# EAGLE board all_board (EAGLE 7.6.0)
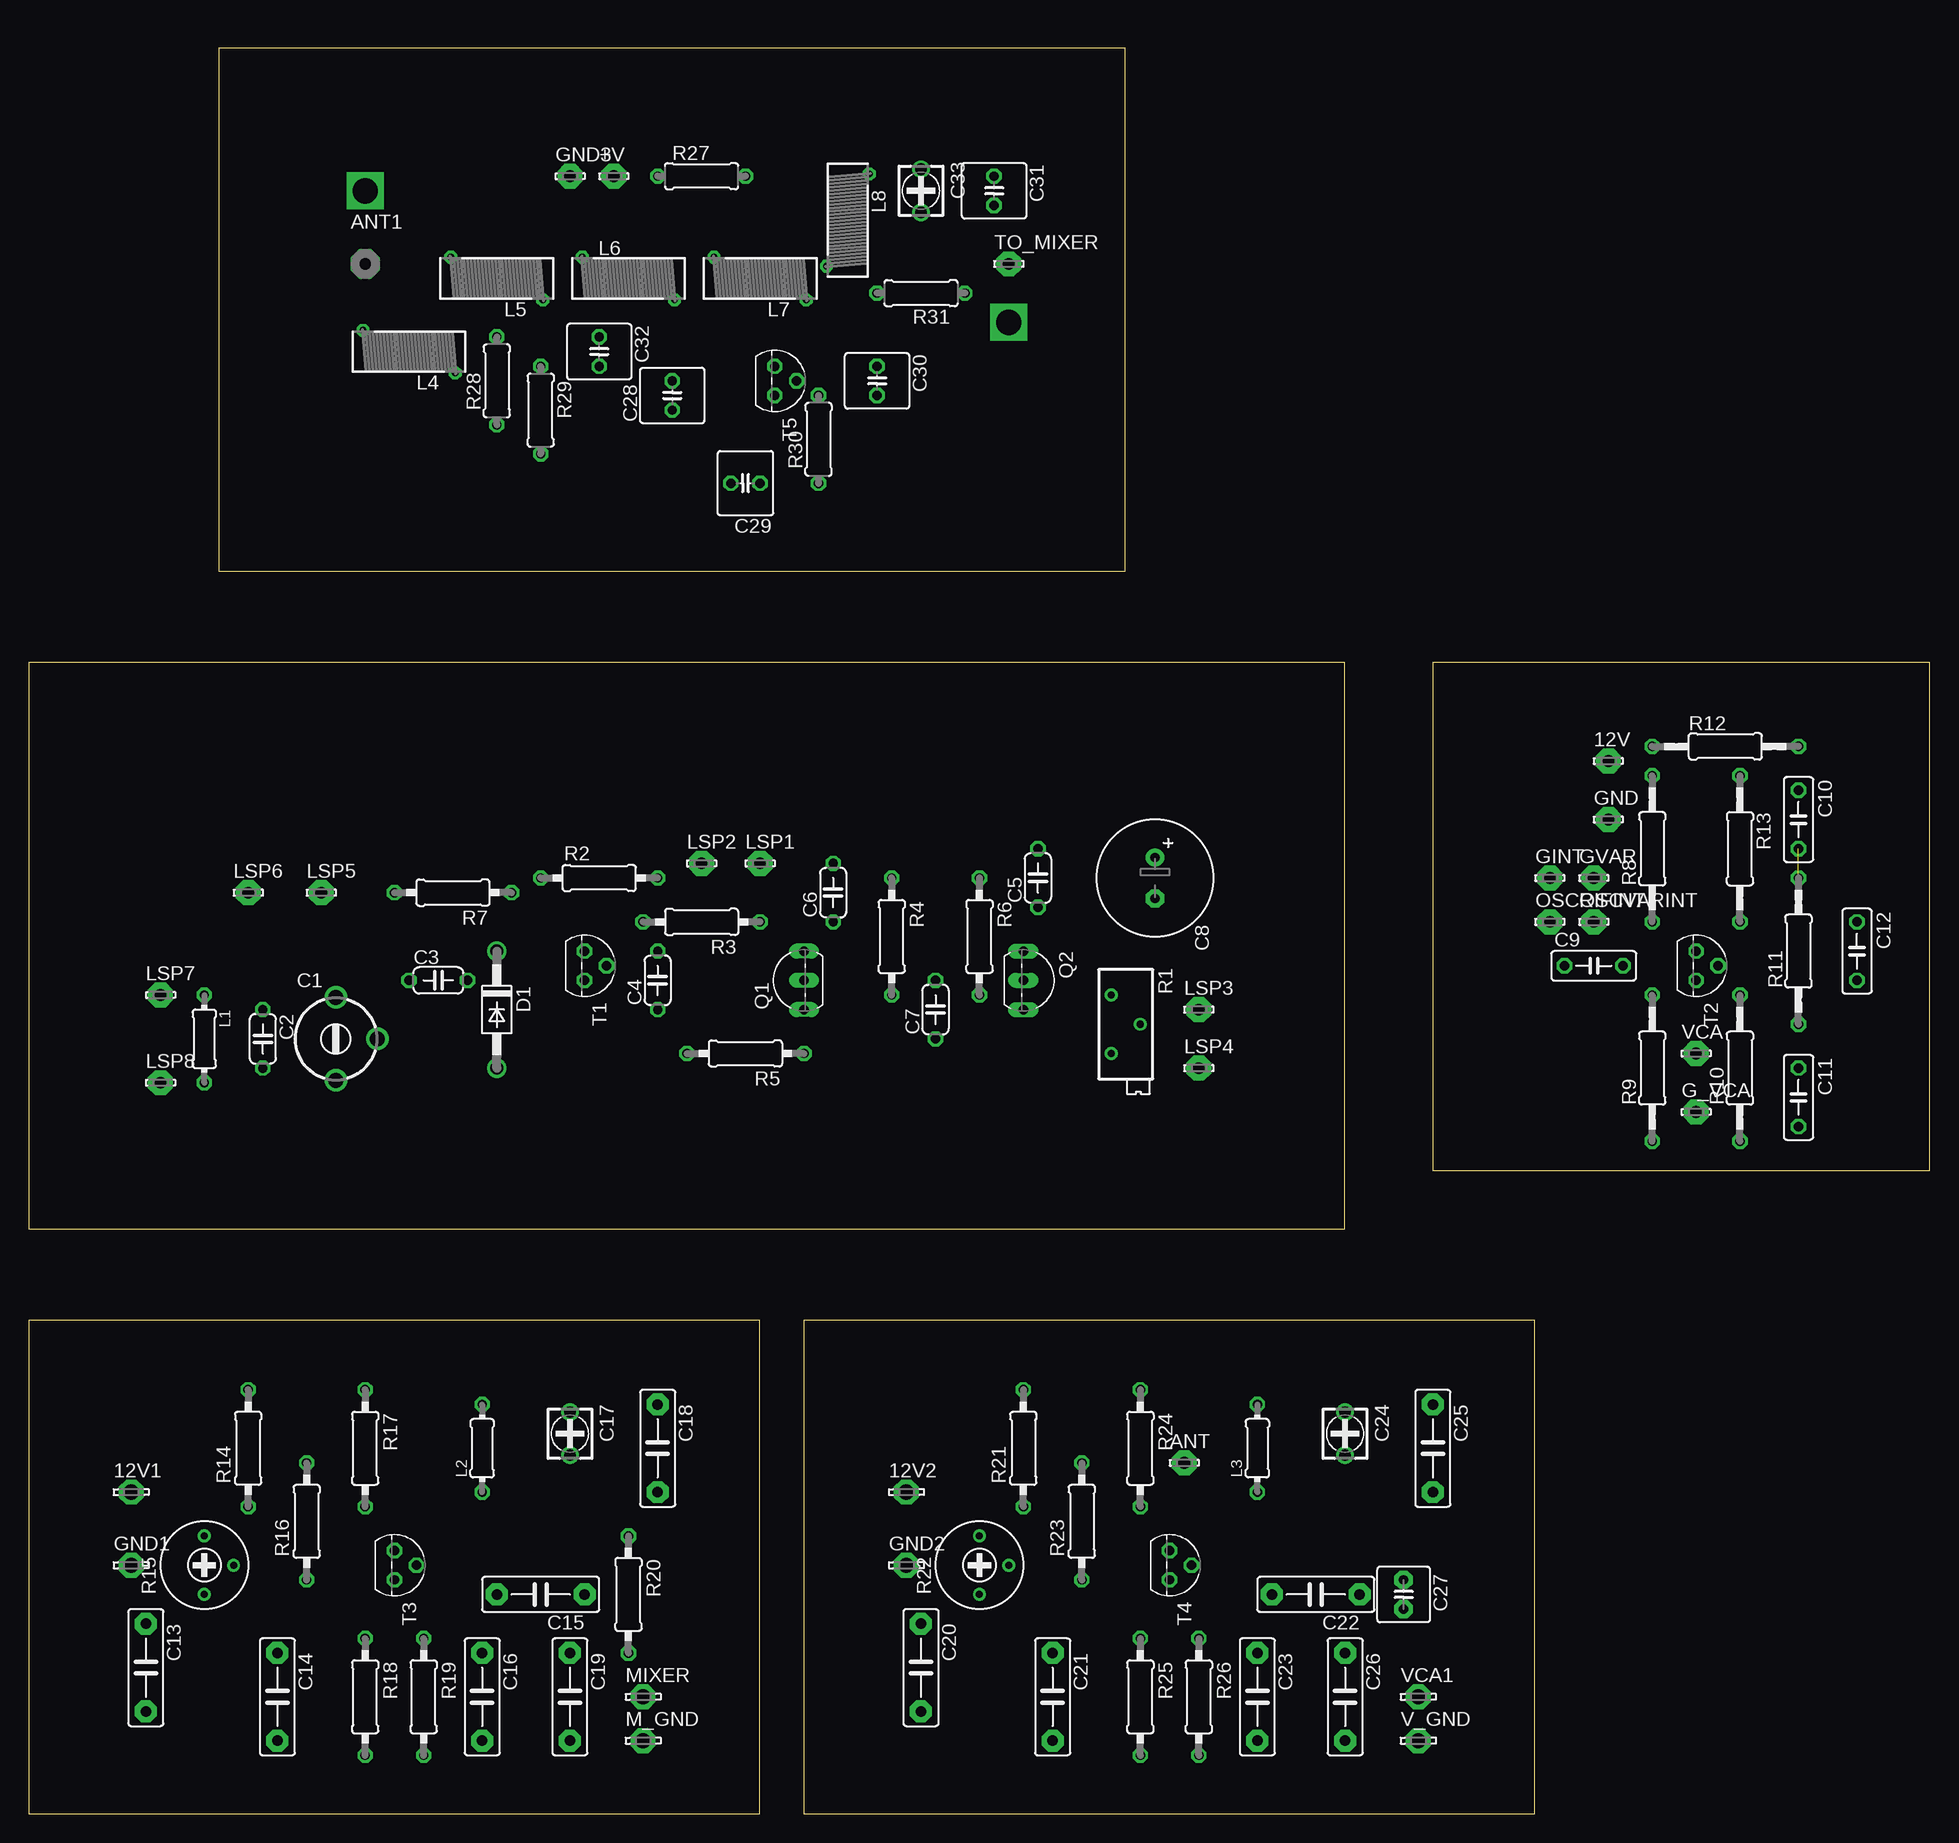
[diagram p0: board, top side]
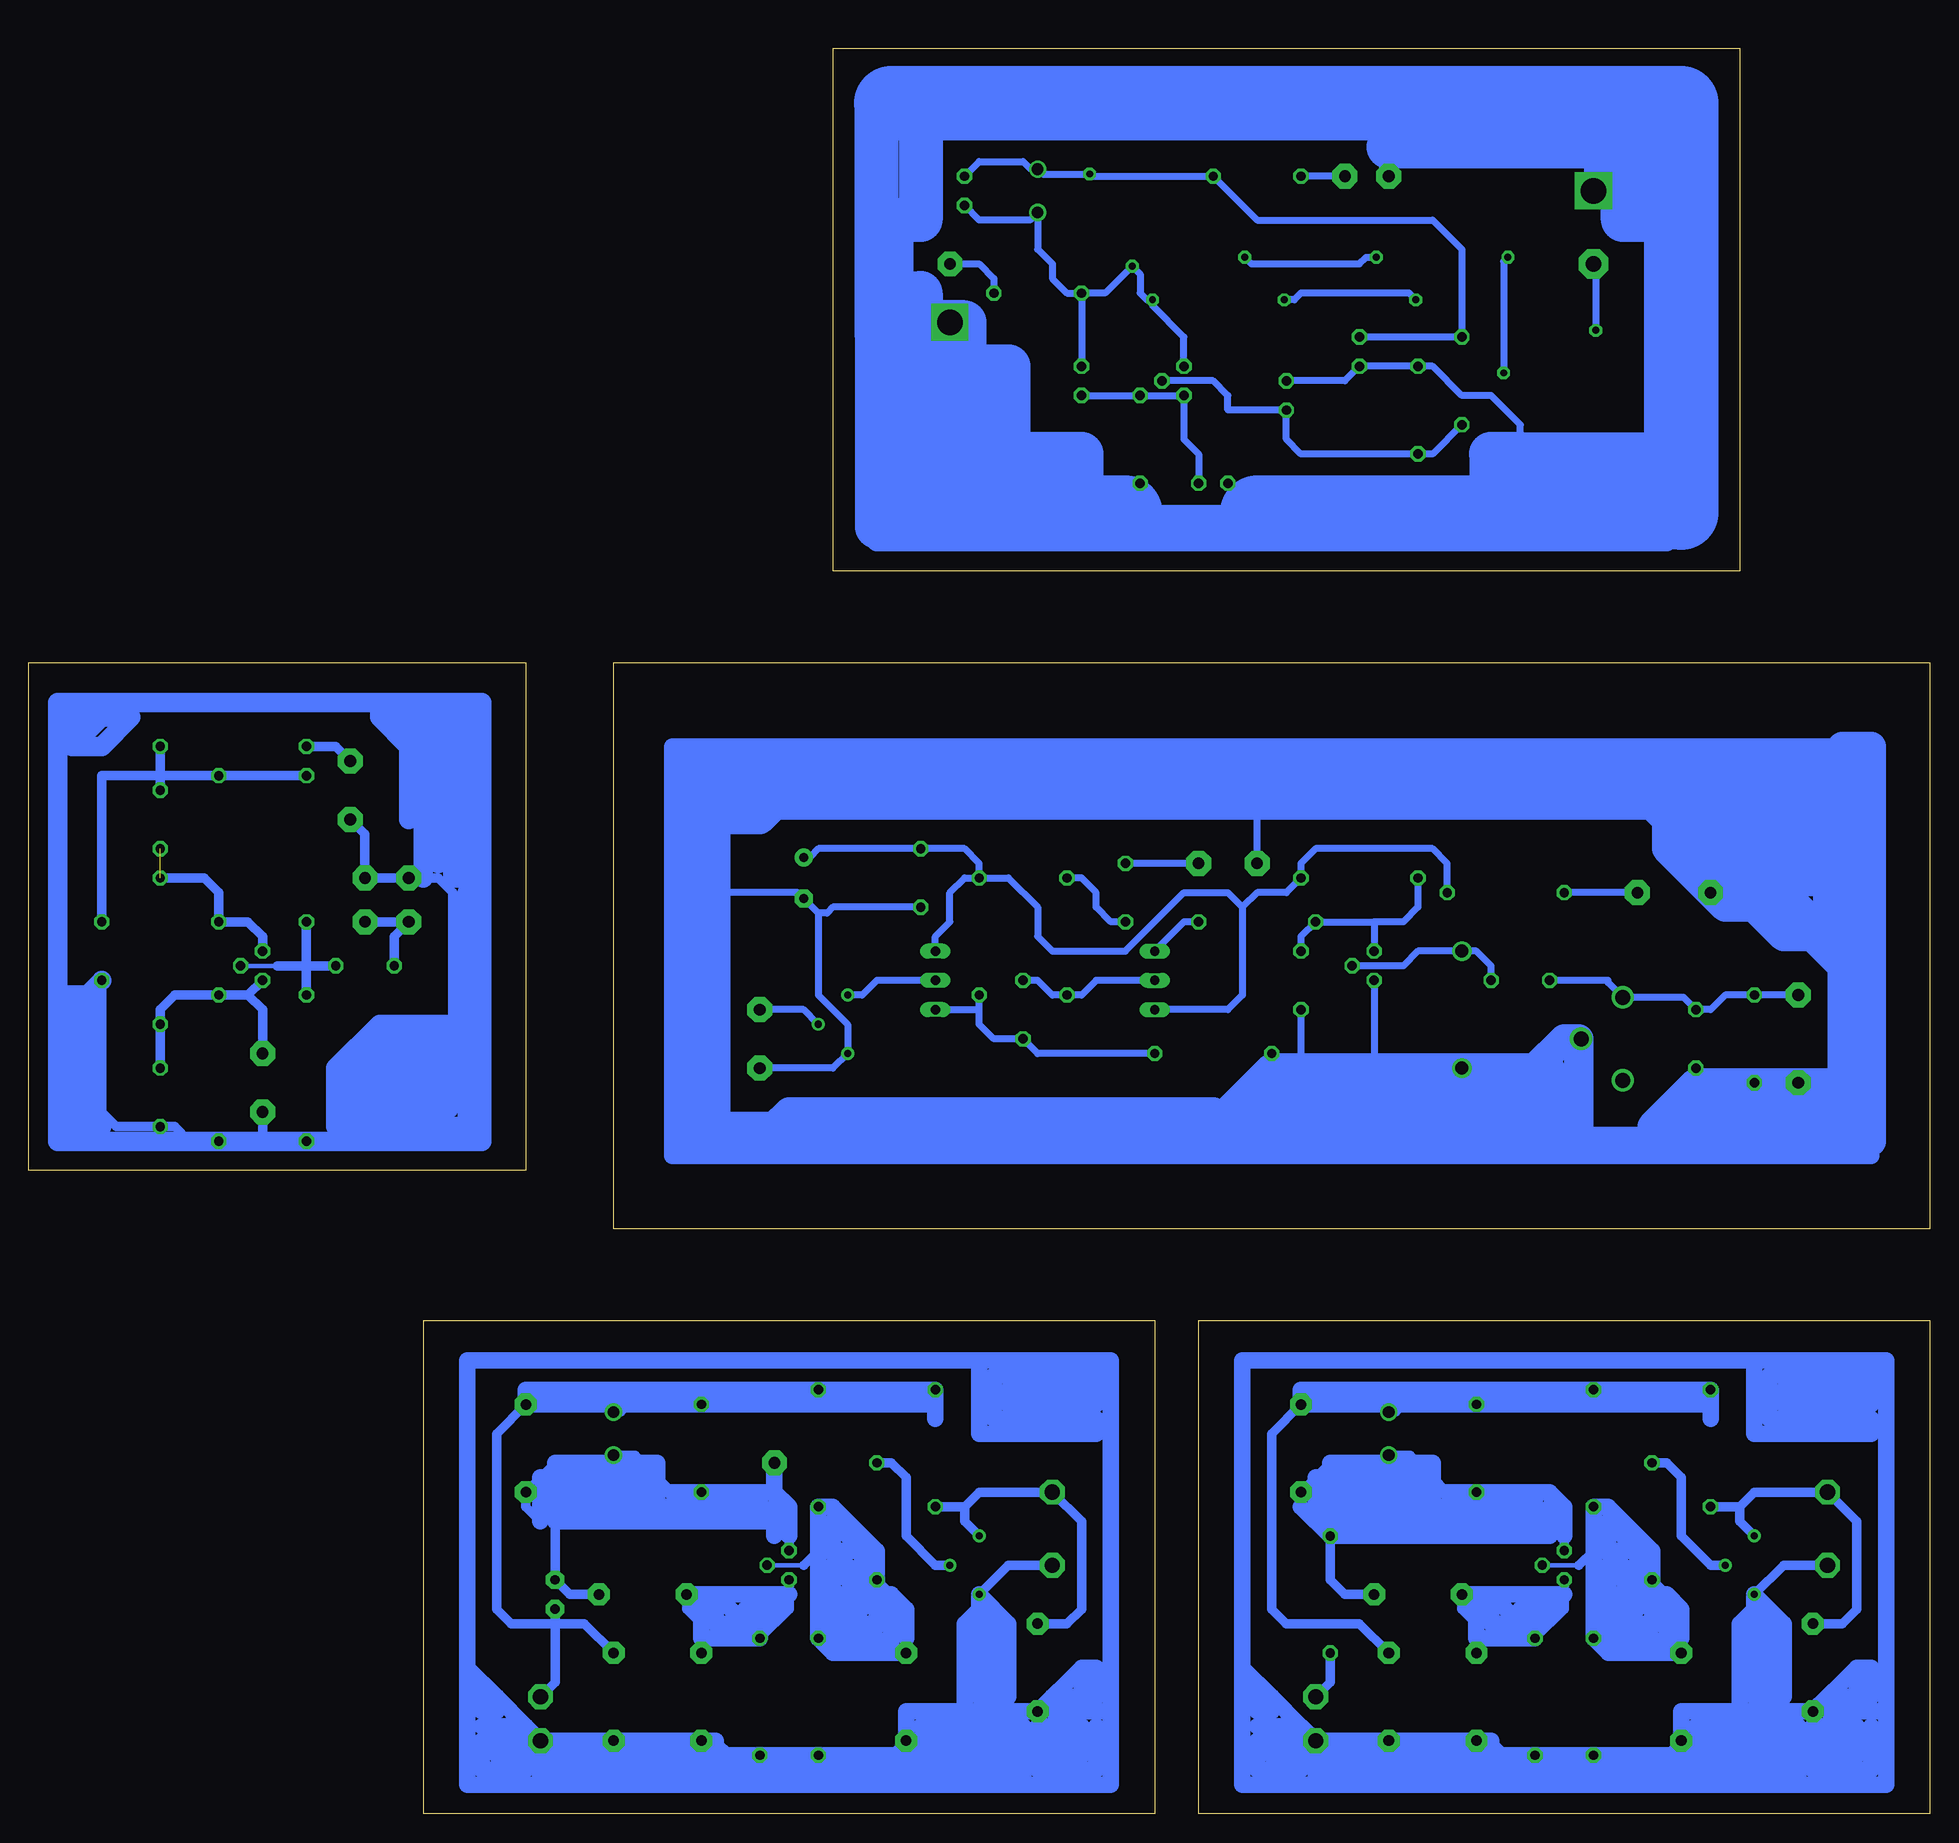
[diagram p1: board, bottom side, seen from below]

Size 165.08 x 153.34 mm. Coordinates in mm from the lower left corner, seen from the top.
Outline: 0,50.8 114.28,50.8 114.28,100 0,100 0,50.8
Outline: 121.92,55.88 165.08,55.88 165.08,100 121.92,100 121.92,55.88
Outline: 0,0 63.48,0 63.48,42.85 0,42.85 0,0
Outline: 67.31,0 130.79,0 130.79,42.85 67.31,42.85 67.31,0
Outline: 16.51,107.95 95.23,107.95 95.23,153.34 16.51,153.34 16.51,107.95
Copper layers (1*16): Top 0.035mm / dielectric 1.5mm / Bottom 0.035mm
Design rules "default": minimum track width 10mil, minimum drill 24mil, track to track 8mil, track to pad 8mil, pad to pad 8mil, via to via 8mil, smd to smd 8mil, copper to edge 40mil, drill to drill 8mil, minimum pad ring 10mil, minimum via ring 8mil, stop-mask expansion 4mil, vias tented up to drill 0mil, thermal gap 10mil

## Footprints (pad centres in the part's own frame; a part is rotated, then mirrored left to right if it is on the bottom)
LSP10 = drill 1.016 pad 2.159 octagon: MP 0,0
LSP13 = drill 1.321 pad 2.159 octagon: MP 0,0
PAD-01 = drill 1.321 pad 2.54 octagon: 1 0,0
CTRIM808-BC = drill 1.3: 1 -3.607,0; 2 0,3.607; 3 3.607,0
C050-024X044 = drill 0.813 octagon: 1 -2.54,0; 2 2.54,0
E3,5-10 = drill 0.813 pad 1.6: + -1.778,0 | drill 0.813 pad 1.6 octagon: - 1.778,0
C050-025X075 = drill 0.813 octagon: 1 -2.54,0; 2 2.54,0
C7.5B3 = drill 0.914 pad 1.905 octagon: 1 -3.81,0; 2 3.81,0
3008 = drill 1: + -1.875,0; - 1.875,0
C2.5-5 = drill 0.813 pad 1.6 octagon: 1 -1.27,0; 2 1.27,0
C025-060X050 = drill 0.813 octagon: 1 -1.27,0; 2 1.27,0
DO41-10 = drill 1.118: A 5.08,0; C -5.08,0
0204/7 = drill 0.813 octagon: 1 -3.81,0; 2 3.81,0
Z28/7 = drill 0.6 octagon: 1 4,-1.85; 2 -4,1.85
TO92- = drill 0.813 long: 1 2.54,0; 2 0,0; 3 -2.54,0
RTRIMT93XB = drill 0.61: 1 1.27,-2.54; 2 -1.27,0; 3 1.27,2.54
0207/10 = drill 0.813 octagon: 1 -5.08,0; 2 5.08,0
0207/12 = drill 0.813 octagon: 1 -6.35,0; 2 6.35,0
RTRIM3339P = drill 0.61: 1 -2.54,0; 2 0,-2.54; 3 2.54,0
0207/7 = drill 0.813 octagon: 1 -3.81,0; 2 3.81,0
TO92 = drill 0.813 octagon: 1 1.27,0; 2 0,1.905; 3 -1.27,0

## Placement (x,y rotation side)
12V  LSP10  [LSP10]  137.16,91.44 0 top
12V1  LSP13  [LSP13]  8.89,27.94 0 top
12V2  LSP13  [LSP13]  76.2,27.94 0 top
+V  LSP10  [LSP10]  50.8,142.24 0 top
ANT  LSP10  [LSP10]  100.33,30.48 0 top
ANT1  [PAD-01]  29.21,134.62 0 top
C1  10/40pF  [CTRIM808-BC]  26.67,67.31 270 top
C2  220pF  [C050-024X044]  20.32,67.31 270 top
C3  4,7pF  [C050-024X044]  35.56,72.39 0 top
C4  100nF  [C050-024X044]  54.61,72.39 90 top
C5  100nF  [C050-024X044]  87.63,81.28 90 top
C6  4,7pF  [C050-024X044]  69.85,80.01 90 top
C7  1nF  [C050-024X044]  78.74,69.85 90 top
C8  10uF  [E3,5-10]  97.79,81.28 270 top
C9  10nF  [C050-025X075]  135.89,73.66 0 top
C10  4,7nF  [C050-025X075]  153.67,86.36 270 top
C11  4,7nF  [C050-025X075]  153.67,62.23 270 top
C12  100nF  [C050-025X075]  158.75,74.93 270 top
C13  100nF  [C7.5B3]  10.16,12.7 270 top
C14  100nF  [C7.5B3]  21.59,10.16 270 top
C15  680pF  [C7.5B3]  44.45,19.05 180 top
C16  33nF  [C7.5B3]  39.37,10.16 270 top
C17  10/40 pF  [3008]  46.99,33.02 270 top
C18  220pF  [C7.5B3]  54.61,31.75 270 top
C19  33nF  [C7.5B3]  46.99,10.16 270 top
C20  100nF  [C7.5B3]  77.47,12.7 270 top
C21  100nF  [C7.5B3]  88.9,10.16 270 top
C22  270pF  [C7.5B3]  111.76,19.05 180 top
C23  12nF  [C7.5B3]  106.68,10.16 270 top
C24  10/40 pF  [3008]  114.3,33.02 270 top
C25  220pF  [C7.5B3]  121.92,31.75 270 top
C26  33nF  [C7.5B3]  114.3,10.16 270 top
C27  4,7pF  [C2.5-5]  119.38,19.05 270 top
C28  100nF  [C025-060X050]  55.88,123.19 90 top
C29  33nF  [C025-060X050]  62.23,115.57 180 top
C30  680pF  [C025-060X050]  73.66,124.46 270 top
C31  220pF  [C025-060X050]  83.82,140.97 270 top
C32  33nF  [C025-060X050]  49.53,127 270 top
C33  10/40pF  [3008]  77.47,140.97 270 top
D1  1N4004  [DO41-10]  40.64,69.85 270 top
G_VCA  LSP10  [LSP10]  144.78,60.96 0 top
GINT  LSP10  [LSP10]  132.08,81.28 0 top
GND  LSP10  [LSP10]  137.16,86.36 0 top
GND1  LSP13  [LSP13]  8.89,21.59 0 top
GND2  LSP13  [LSP13]  76.2,21.59 0 top
GND3  LSP10  [LSP10]  46.99,142.24 0 top
GVAR  LSP10  [LSP10]  135.89,81.28 0 top
L1  330uH  [0204/7]  15.24,67.31 270 top
L2  1mH  [0204/7]  39.37,31.75 90 top
L3  330uH  [0204/7]  106.68,31.75 90 top
L4  10mH  [Z28/7]  33.02,127 180 top
L5  10mH  [Z28/7]  40.64,133.35 180 top
L6  10mH  [Z28/7]  52.07,133.35 0 top
L7  10mH  [Z28/7]  63.5,133.35 180 top
L8  1mH  [Z28/7]  71.12,138.43 270 top
LSP1  LSP10  [LSP10]  63.5,82.55 0 top
LSP2  LSP10  [LSP10]  58.42,82.55 0 top
LSP3  LSP10  [LSP10]  101.6,69.85 0 top
LSP4  LSP10  [LSP10]  101.6,64.77 0 top
LSP5  LSP10  [LSP10]  25.4,80.01 0 top
LSP6  LSP10  [LSP10]  19.05,80.01 0 top
LSP7  LSP10  [LSP10]  11.43,71.12 0 top
LSP8  LSP10  [LSP10]  11.43,63.5 0 top
M_GND  LSP13  [LSP13]  53.34,6.35 0 top
MIXER  LSP13  [LSP13]  53.34,10.16 0 top
OSCRIFINT  LSP10  [LSP10]  132.08,77.47 0 top
OSCVARINT  LSP10  [LSP10]  135.89,77.47 0 top
Q1  2N5486  [TO92-]  67.31,72.39 90 top
Q2  2N5486  [TO92-]  86.36,72.39 270 top
R1  10K log  [RTRIMT93XB]  95.25,68.58 180 top
R2  10K  [0207/10]  49.53,81.28 0 top
R3  470K  [0207/10]  58.42,77.47 180 top
R4  1M  [0207/10]  74.93,76.2 270 top
R5  4,7M  [0207/10]  62.23,66.04 180 top
R6  4,7M  [0207/10]  82.55,76.2 270 top
R7  1K  [0207/10]  36.83,80.01 180 top
R8  560K  [0207/12]  140.97,83.82 90 top
R9  100k  [0207/12]  140.97,64.77 90 top
R10  1K  [0207/12]  148.59,64.77 90 top
R11  1K  [0207/12]  153.67,74.93 90 top
R12  1K  [0207/12]  147.32,92.71 0 top
R13  6K8  [0207/12]  148.59,83.82 270 top
R14  1K  [0207/10]  19.05,31.75 90 top
R15  10K Lin  [RTRIM3339P]  15.24,21.59 90 top
R16  330K  [0207/10]  24.13,25.4 90 top
R17  150K  [0207/10]  29.21,31.75 270 top
R18  33K  [0207/10]  29.21,10.16 270 top
R19  1K  [0207/10]  34.29,10.16 270 top
R20  330K  [0207/10]  52.07,19.05 270 top
R21  1K  [0207/10]  86.36,31.75 90 top
R22  10K Lin  [RTRIM3339P]  82.55,21.59 90 top
R23  1M  [0207/10]  91.44,25.4 90 top
R24  150K  [0207/10]  96.52,31.75 270 top
R25  33K  [0207/10]  96.52,10.16 270 top
R26  1K  [0207/10]  101.6,10.16 270 top
R27  1K  [0207/7]  58.42,142.24 0 top
R28  150K  [0207/7]  40.64,124.46 90 top
R29  33K  [0207/7]  44.45,121.92 270 top
R30  1K  [0207/7]  68.58,119.38 90 top
R31  330K  [0207/7]  77.47,132.08 180 top
T1  BC547  [TO92]  48.26,73.66 270 top
T2  BC547  [TO92]  144.78,73.66 270 top
T3  BC547  [TO92]  31.75,21.59 270 top
T4  BC547  [TO92]  99.06,21.59 270 top
T5  BC547  [TO92]  64.77,124.46 270 top
TO_MIXER  LSP10  [LSP10]  85.09,134.62 0 top
V_GND  LSP13  [LSP13]  120.65,6.35 0 top
VCA  LSP10  [LSP10]  144.78,66.04 0 top
VCA1  LSP13  [LSP13]  120.65,10.16 0 top

## Library data of the parts
12V 12V1 12V2 +V ANT G_VCA GINT GND GND1-GND3 GVAR LSP1-LSP8 M_GND MIXER OSCRIFINT OSCVARINT TO_MIXER V_GND VCA VCA1 = solpad
ANT1 = discrete
C1-C12 L1-L3 R27-R31 = rcl
C13-C16 C18-C23 C25-C27 = capacitor-wima
C17 C24 C33 = c-trimm; OC_FARNELL: unknown; OC_NEWARK: unknown
C28-C32 R1-R26 = resistor
D1 = diode
L4-L8 = inductor-neosid; OC_FARNELL: unknown; OC_NEWARK: unknown
Q1 Q2 = transistor-fet
T1-T5 = transistor

## Nets
N$1: C1.1 C2.1 C3.1 L1.1 LSP7.MP
N$2: C6.2 LSP1.MP
N$3: C3.2 D1.C T1.2
N$4: C4.2 R2.1 R3.2 T1.3
N$5: C5.2 C8.+ Q1.3 Q2.3 R2.2 R6.1 R7.1
N$6: Q1.1 R3.1
N$7: C6.1 R4.1
N$8: C7.2 Q1.2 R4.2
N$9: C7.1 Q2.1 R5.1 R6.2
N$10: Q2.2 R1.1
N$11: LSP3.MP R1.2
N$12: LSP5.MP R7.2
N$13: C9.2 R8.1 R9.2 T2.2
N$14: C10.2 R11.2 R13.2 T2.3
N$15: C11.1 R10.2 R11.1 T2.1 VCA.MP
N$16: C1.2 C2.2 C4.1 C5.1 C8.- D1.A L1.2 LSP2.MP LSP4.MP LSP6.MP LSP8.MP R1.3 R5.2 T1.1
N$17: C10.1 C12.1 R8.2 R12.2 R13.1
N$18: C9.1 OSCRIFINT.MP OSCVARINT.MP
N$19: 12V.MP R12.1
N$21: C11.2 C12.2 G_VCA.MP GINT.MP GND.MP GVAR.MP R9.1 R10.1
N$23: 12V1.MP C13.1 R14.1 R15.3
N$24: C17.+ C18.1 C19.1 L2.2 R14.2 R17.1
N$25: C14.1 R16.1 R17.2 R18.1 T3.2
N$26: R15.2 R16.2
N$27: C15.2 C16.1 R19.1 T3.1
N$28: MIXER.MP R20.2
N$29: C13.2 C14.2 C16.2 C19.2 GND1.MP M_GND.MP R15.1 R18.2 R19.2
N$30: C15.1 C17.- C18.2 L2.1 R20.1 T3.3
N$31: 12V2.MP C20.1 R21.1 R22.3
N$32: C24.+ C25.1 C26.1 L3.2 R21.2 R24.1
N$33: C21.1 R23.1 R24.2 R25.1 T4.2
N$34: R22.2 R23.2
N$35: C22.2 C23.1 R26.1 T4.1
N$36: C27.2 VCA1.MP
N$37: C20.2 C21.2 C23.2 C26.2 GND2.MP R22.1 R25.2 R26.2 V_GND.MP
N$38: ANT.MP C22.1 C24.- C25.2 C27.1 L3.1 T4.3
N$39: C31.1 C32.1 C33.+ L8.2 R27.2 R28.2
N$40: ANT1.1 L4.1
N$41: L4.2 L5.1
N$42: L5.2 L6.1
N$43: L6.2 L7.1
N$44: C30.1 C31.2 C33.- L7.2 L8.1 R31.2 T5.3
N$45: C28.1 R28.1 R29.2 T5.2
N$46: C29.1 C30.2 R30.2 T5.1
N$47: R31.1 TO_MIXER.MP
N$48: +V.MP R27.1
N$51: C28.2 C29.2 C32.2 GND3.MP R29.1 R30.1

## Tracks (layer width: path | path; a pad name or v marks a point on that pad's centre or on a via)
N$1
  Bottom 0.61: LSP7.MP L1.1 17.78,71.12 19.05,69.85 C2.1 21.39,70.92 C1.1 27.94,72.19 27.94,72.39 C3.1
N$2
  Bottom 0.61: LSP1.MP C6.2
N$3
  Bottom 0.61: C3.2 38.1,73.66 39.37,74.93 D1.C 44.45,74.93 45.72,73.66 T1.2
N$4
  Bottom 0.61: R2.1 44.45,78.74 45.72,77.47 48.26,77.47 | 48.26,77.47 T1.3 | 48.26,77.47 R3.2 54.61,76.2 C4.2
N$5
  Bottom 0.61: R7.1 41.91,82.55 43.18,83.82 53.34,83.82 54.61,82.55 R2.2 55.88,80.01 58.42,80.01 59.69,78.74 | C8.+ 97.28,83.06 96.52,83.82 C5.2 83.82,83.82 82.55,82.55 R6.1 | Q2.3 86.36,76.2 85.09,77.47 85.09,80.01 83.82,81.28 R6.1 | 59.69,78.74 59.69,71.12 60.96,69.85 Q1.3 | R6.1 80.01,81.28 77.47,78.74 77.47,76.2 76.2,74.93 69.85,74.93 64.77,80.01 60.96,80.01 59.69,78.74
N$6
  Bottom 0.61: R3.1 64.77,77.47 Q1.1
N$7
  Bottom 0.61: C6.1 71.12,77.47 72.39,78.74 72.39,80.01 73.66,81.28 R4.1
N$8
  Bottom 0.61: Q1.2 72.39,72.39 73.66,71.12 R4.2 76.2,71.12 77.47,72.39 C7.2
N$9
  Bottom 0.61: R5.1 77.47,66.04 C7.1 81.28,67.31 82.55,68.58 82.55,69.85 | 82.55,69.85 R6.2 | Q2.1 82.55,69.85
N$10
  Bottom 0.61: Q2.2 91.44,72.39 92.71,71.12 R1.1
N$11
  Bottom 0.61: R1.2 97.79,69.85 LSP3.MP
N$12
  Bottom 0.61: LSP5.MP R7.2
N$13
  Bottom 0.406: T2.2 143.51,73.66
  Bottom 0.813: R8.1 140.97,73.66 | C9.2 140.97,73.66 | 140.97,73.66 143.51,73.66 | R9.2 140.97,73.66
N$14  (1 unrouted)
  Bottom 0.813: R11.2 149.86,81.28 148.59,80.01 R13.2 146.05,77.47 144.78,76.2 T2.3
N$15
  Bottom 0.813: T2.1 146.05,71.12 | 146.05,71.12 R10.2 152.4,71.12 153.67,69.85 R11.1 C11.1 | VCA.MP 144.78,69.85 146.05,71.12
N$16
  Bottom 0.61: LSP8.MP L1.2 15.24,57.15 | C2.2 20.32,63.5 20.32,57.15 | C1.2 30.48,67.11 30.48,59.69 30.48,57.15 | 20.32,57.15 30.48,57.15 | 15.24,57.15 20.32,57.15 | D1.A 40.64,57.15 | T1.1 48.26,57.15 | R5.2 57.15,64.77 57.15,57.15 54.61,57.15 | LSP4.MP 95.25,64.77 R1.3 93.98,68.58 96.52,71.12 96.52,78.23 | 96.52,78.23 C8.- 98.3,80.01 109.22,80.01 109.22,92.71 58.42,92.71 | LSP6.MP 8.89,80.01 5.08,80.01 | 5.08,80.01 5.08,58.42 | 5.08,57.15 15.24,57.15 | C5.1 95.25,78.74 95.76,78.23 96.52,78.23 | C4.1 54.61,57.15 | 54.61,57.15 48.26,57.15 | 48.26,57.15 40.64,57.15 | 40.64,57.15 30.48,57.15 | LSP2.MP 58.42,92.71 | 58.42,92.71 5.08,92.71 5.08,80.01
  Bottom 1.422: 5.08,92.71 109.22,92.71 109.22,57.15 5.08,57.15 5.08,58.42
  Bottom 2.54: 62.23,60.96 99.06,60.96 100.33,59.69 105.41,59.69 | 20.32,88.9 105.41,88.9 | 105.41,88.9 106.68,88.9 | 106.68,82.55 105.41,83.82 | 105.41,83.82 105.41,88.9 | 6.35,91.44 107.95,91.44 107.95,58.42 105.41,58.42 | 105.41,58.42 64.77,58.42 | 64.77,58.42 7.62,58.42 | 7.62,58.42 5.08,58.42 5.08,92.71 7.62,92.71 7.62,73.66 | 7.62,73.66 7.62,58.42 | LSP6.MP 19.05,88.9 | 19.05,88.9 19.05,90.17 | 19.05,88.9 8.89,88.9 8.89,81.28 17.78,81.28 17.78,86.36 10.16,86.36 10.16,83.82 16.51,83.82 | 105.41,83.82 105.41,59.69 | 105.41,59.69 105.41,58.42 | 64.77,58.42 63.5,59.69 62.23,59.69 57.15,64.77 D1.A 34.29,64.77 31.75,67.31 30.48,67.31 30.48,59.69 59.69,59.69 58.42,60.96 58.42,62.23 31.75,62.23 33.02,63.5 33.02,64.77 | 8.89,63.5 20.32,63.5 21.59,62.23 | 21.59,62.23 24.13,59.69 8.89,59.69 8.89,62.23 21.59,62.23 | 7.62,73.66 10.16,76.2 12.7,76.2 16.51,80.01 LSP6.MP | LSP6.MP 17.78,78.74 11.43,78.74 10.16,77.47 8.89,77.47 8.89,80.01 | LSP6.MP 22.86,83.82 22.86,87.63 20.32,87.63 20.32,83.82 24.13,87.63 100.33,87.63 101.6,86.36 104.14,86.36
N$17
  Bottom 0.813: R12.2 153.67,90.17 | 153.67,90.17 C10.1 | R8.2 R13.1 153.67,90.17 | C12.1 158.75,90.17 153.67,90.17
N$18
  Bottom 0.813: C9.1 133.35,76.2 OSCRIFINT.MP OSCVARINT.MP
N$19
  Bottom 0.813: 12V.MP 138.43,92.71 R12.1
N$20
  Bottom 1.676: 127,80.01 127,59.69 128.27,59.69
N$21
  Bottom 0.813: 144.78,58.42 R9.1 130.81,58.42 129.54,59.69 128.27,60.96 128.27,68.58 128.27,80.01 129.54,81.28 130.81,81.28 GVAR.MP | 144.78,58.42 R10.1 151.13,58.42 152.4,59.69 C11.2 157.48,59.69 158.75,60.96 C12.2 | GND.MP 135.89,85.09 GVAR.MP | GVAR.MP GINT.MP | G_VCA.MP 144.78,58.42
  Bottom 1.676: 132.08,86.36 132.08,92.71 134.62,95.25 134.62,96.52 | 127,82.55 127,95.25 129.54,95.25 | 127,81.28 128.27,81.28 128.27,96.52 | 162.56,71.12 162.56,58.42 125.73,58.42 125.73,96.52 128.27,96.52 | 162.56,71.12 162.56,96.52 134.62,96.52 | 134.62,96.52 133.35,96.52 | 130.81,96.52 128.27,96.52 | 130.81,95.25 133.35,95.25 133.35,96.52 | 133.35,96.52 130.81,96.52 | 130.81,96.52 130.81,95.25 | 130.81,95.25 130.81,81.28 | 129.54,82.55 129.54,91.44 | 129.54,91.44 129.54,95.25 | 129.54,95.25 130.81,95.25 | 134.62,96.52 129.54,91.44 | C12.2 160.02,71.12 | 160.02,71.12 162.56,71.12 | 162.56,71.12 161.29,69.85 161.29,59.69 158.75,59.69 160.02,60.96 160.02,71.12 | 128.27,68.58 129.54,68.58 | 129.54,68.58 134.62,68.58 138.43,64.77 138.43,59.69 129.54,59.69 129.54,68.58 | 129.54,68.58 130.81,67.31 133.35,67.31 134.62,66.04 | 134.62,66.04 134.62,64.77 | 134.62,64.77 134.62,60.96 132.08,60.96 | 132.08,60.96 130.81,60.96 130.81,66.04 133.35,66.04 132.08,64.77 | 132.08,64.77 132.08,63.5 | 132.08,63.5 133.35,62.23 132.08,60.96 | 132.08,60.96 132.08,63.5 | 132.08,64.77 133.35,64.77 | 134.62,64.77 133.35,64.77 | 133.35,64.77 134.62,66.04 | 134.62,66.04 134.62,67.31 137.16,64.77 137.16,60.96 135.89,60.96 135.89,64.77 134.62,63.5 133.35,63.5
N$22
  Bottom 1.676: 156.21,95.25 158.75,92.71 161.29,92.71 161.29,95.25 158.75,95.25 | 160.02,93.98 158.75,95.25 | 158.75,95.25 157.48,95.25
N$23
  Bottom 0.813: 16.51,26.67 15.24,27.94 12V1.MP 6.35,25.4 6.35,17.78 7.62,16.51 C13.1 | 16.51,26.67 R14.1 | R15.3 16.51,25.4 16.51,26.67
N$24
  Bottom 0.813: R14.2 R17.1 36.83,36.83 38.1,35.56 L2.2 45.72,35.56 46.38,34.89 C17.+ 47.66,35.56 C18.1 57.15,33.02 57.15,17.78 55.88,16.51 49.53,16.51 C19.1
  Bottom 1.422: 19.05,35.56 R14.2 38.1,36.83 | 19.05,34.29 19.05,35.56 | 19.05,35.56 L2.2 39.37,36.83 | 39.37,36.83 38.1,36.83 | 38.1,36.83 38.1,35.56 C18.1 54.61,36.83 39.37,36.83
N$25
  Bottom 0.406: T3.2 30.48,21.59
  Bottom 0.813: C14.1 21.59,15.24 | 22.86,19.05 R16.1 | R16.1 25.4,20.32 | 27.94,22.86 28.58,23.5 | 28.58,23.5 29.21,24.13 R17.2 | R16.1 26.67,17.78 R18.1 | 30.48,21.59 29.21,22.86 28.58,23.5
  Bottom 1.422: 29.21,22.86 R18.1 | 27.94,16.51 27.94,19.05 | 27.94,19.05 27.94,21.59 26.67,20.32 25.4,20.32 | 25.4,20.32 26.67,19.05 27.94,19.05 | 27.94,19.05 26.67,17.78 | R16.1 24.13,22.86 27.94,26.67 R17.2 29.21,22.86 | 29.21,22.86 27.94,22.86 | 27.94,22.86 25.4,22.86 | 25.4,22.86 25.4,20.32 | 25.4,20.32 27.94,22.86 | 27.94,22.86 27.94,25.4 25.4,22.86 | C14.1 22.86,13.97 | 22.86,13.97 27.94,13.97 R18.1 | R18.1 27.94,16.51 | 27.94,16.51 24.13,16.51 | 24.13,16.51 22.86,16.51 | 22.86,16.51 22.86,17.78 | 22.86,16.51 22.86,13.97 | 22.86,13.97 24.13,15.24 27.94,15.24 24.13,19.05 24.13,16.51 | 24.13,16.51 22.86,17.78 | 22.86,17.78 22.86,19.05 21.59,17.78 21.59,15.24
N$26
  Bottom 0.813: R16.2 22.86,30.48 21.59,29.21 21.59,24.13 19.05,21.59 R15.2
N$27
  Bottom 0.813: C16.1 39.37,15.24 39.37,16.51 40.64,17.78 C15.2 | T3.1 31.75,19.05 31.75,17.78 R19.1 35.56,16.51
  Bottom 1.422: R19.1 39.37,15.24 39.37,17.78 | C15.2 39.37,17.78 | 39.37,17.78 38.1,17.78 38.1,16.51 35.56,16.51 38.1,19.05 C15.2 | C15.2 31.75,19.05 33.02,17.78 | 33.02,17.78 34.29,16.51 35.56,17.78 33.02,17.78
N$28
  Bottom 0.813: R20.2 52.07,11.43 MIXER.MP
N$29
  Bottom 0.813: GND1.MP 12.7,21.59 R15.1 | C13.2 10.16,7.62 | 10.16,6.35 11.43,5.08 15.24,5.08 | 15.24,5.08 20.32,5.08 C14.2 22.86,5.08 R18.2 R19.2 36.83,5.08 38.1,6.35 C16.2 | 40.64,6.35 C16.2 | C16.2 C19.2 M_GND.MP | 15.24,17.78 15.24,5.08
  Bottom 1.422: 5.08,12.7 6.35,12.7 C13.2 | 5.08,7.62 5.08,3.81 10.16,3.81 10.16,5.08 | 5.08,39.37 3.81,39.37 3.81,8.89 | 5.08,39.37 15.24,39.37 | 15.24,39.37 59.69,39.37 59.69,12.7 | 59.69,12.7 59.69,11.43 | 59.69,11.43 59.69,2.54 53.34,2.54 | 53.34,2.54 11.43,2.54 | 11.43,2.54 3.81,2.54 3.81,8.89 | 11.43,3.81 11.43,5.08 38.1,5.08 | 53.34,5.08 53.34,3.81 | 53.34,3.81 53.34,2.54 | 53.34,3.81 11.43,3.81 | 11.43,2.54 11.43,3.81 | 38.1,5.08 53.34,5.08 | 53.34,5.08 M_GND.MP | M_GND.MP 38.1,6.35 38.1,5.08 | 8.89,8.89 3.81,8.89 | 10.16,6.35 10.16,7.62 6.35,7.62 6.35,6.35 | 6.35,6.35 6.35,5.08 10.16,5.08 | 10.16,5.08 10.16,6.35 | 10.16,6.35 6.35,6.35 | C13.2 13.97,8.89 | 13.97,8.89 16.51,8.89 | 16.51,8.89 21.59,8.89 C14.2 11.43,6.35 11.43,7.62 20.32,7.62 | M_GND.MP 54.61,6.35 | 57.15,6.35 58.42,6.35 58.42,3.81 54.61,3.81 54.61,5.08 | 54.61,5.08 54.61,6.35 | 54.61,6.35 57.15,6.35 | 57.15,6.35 57.15,5.08 54.61,5.08 | 15.24,39.37 15.24,33.02 5.08,33.02 5.08,34.29 13.97,34.29 13.97,38.1 5.08,38.1 | 5.08,38.1 5.08,39.37 | 5.08,38.1 5.08,36.83 | 5.08,36.83 5.08,35.56 12.7,35.56 12.7,36.83 5.08,36.83 | C13.2 8.89,10.16 6.35,10.16 | 6.35,10.16 5.08,10.16 5.08,12.7 | 5.08,12.7 6.35,11.43 6.35,10.16 | M_GND.MP 54.61,7.62 | 57.15,10.16 59.69,12.7 | 58.42,7.62 54.61,7.62 | 54.61,7.62 57.15,10.16 | 57.15,10.16 58.42,10.16 58.42,8.89 57.15,8.89 59.69,11.43 | 13.97,8.89 12.7,10.16 12.7,16.51 R15.1 15.24,17.78 | 13.97,8.89 15.24,10.16 15.24,17.78 | 15.24,17.78 13.97,16.51 13.97,10.16 | 16.51,8.89 16.51,16.51 15.24,17.78
N$30
  Bottom 0.813: C15.1 50.8,19.05 52.07,20.32 R20.1 53.34,25.4 54.61,26.67 C18.2 52.07,30.48 47.66,30.48 C17.- 45.12,31.14 43.18,29.21 41.91,27.94 L2.1 36.83,27.94 35.56,27.94 34.29,26.67 31.75,24.13 T3.3
  Bottom 1.422: 33.02,25.4 33.02,24.13 R20.1 54.61,26.67 | 33.02,25.4 52.07,25.4 52.07,26.67 | 52.07,26.67 53.34,26.67 | 53.34,26.67 53.34,27.94 | 53.34,27.94 C18.2 | 53.34,25.4 53.34,26.67 | 53.34,27.94 53.34,29.21 43.18,29.21 | 43.18,29.21 43.18,27.94 | 43.18,27.94 43.18,26.67 50.8,26.67 50.8,27.94 | 50.8,27.94 52.07,27.94 | 50.8,27.94 43.18,27.94 | 43.18,29.21 43.18,30.48 52.07,30.48 52.07,26.67 | 52.07,26.67 34.29,26.67 34.29,27.94 | 34.29,27.94 36.83,27.94 41.91,27.94 | 34.29,27.94 33.02,27.94 31.75,26.67 31.75,24.13 33.02,25.4 | 33.02,25.4 33.02,26.67
N$31
  Bottom 0.813: 83.82,26.67 82.55,27.94 12V2.MP 73.66,25.4 73.66,17.78 74.93,16.51 C20.1 | 83.82,26.67 R21.1 | R22.3 83.82,25.4 83.82,26.67
N$32
  Bottom 0.813: R21.2 R24.1 104.14,36.83 105.41,35.56 L3.2 113.03,35.56 113.69,34.89 C24.+ 114.96,35.56 C25.1 124.46,33.02 124.46,17.78 123.19,16.51 116.84,16.51 C26.1
  Bottom 1.422: 86.36,35.56 R21.2 105.41,36.83 | 86.36,34.29 86.36,35.56 | 86.36,35.56 L3.2 106.68,36.83 | 106.68,36.83 105.41,36.83 | 105.41,36.83 105.41,35.56 C25.1 121.92,36.83 106.68,36.83
N$33
  Bottom 0.406: T4.2 97.79,21.59
  Bottom 0.813: C21.1 88.9,15.24 | 90.17,19.05 R23.1 | R23.1 92.71,20.32 | 95.25,22.86 95.88,23.5 | 95.88,23.5 96.52,24.13 R24.2 | R23.1 93.98,17.78 R25.1 | 97.79,21.59 96.52,22.86 95.88,23.5
  Bottom 1.422: 96.52,22.86 R25.1 | 95.25,16.51 95.25,19.05 | 95.25,19.05 95.25,21.59 93.98,20.32 92.71,20.32 | 92.71,20.32 93.98,19.05 95.25,19.05 | 95.25,19.05 93.98,17.78 | R23.1 91.44,22.86 95.25,26.67 R24.2 96.52,22.86 | 96.52,22.86 95.25,22.86 | 95.25,22.86 92.71,22.86 | 92.71,22.86 92.71,20.32 | 92.71,20.32 95.25,22.86 | 95.25,22.86 95.25,25.4 92.71,22.86 | C21.1 90.17,13.97 | 90.17,13.97 95.25,13.97 R25.1 | R25.1 95.25,16.51 | 95.25,16.51 91.44,16.51 | 91.44,16.51 90.17,16.51 | 90.17,16.51 90.17,17.78 | 90.17,16.51 90.17,13.97 | 90.17,13.97 91.44,15.24 95.25,15.24 91.44,19.05 91.44,16.51 | 91.44,16.51 90.17,17.78 | 90.17,17.78 90.17,19.05 88.9,17.78 88.9,15.24
N$34
  Bottom 0.813: R23.2 90.17,30.48 88.9,29.21 88.9,24.13 86.36,21.59 R22.2
N$35
  Bottom 0.813: C23.1 106.68,15.24 106.68,16.51 107.95,17.78 C22.2 | T4.1 99.06,19.05 99.06,17.78 R26.1 102.87,16.51
  Bottom 1.422: R26.1 106.68,15.24 106.68,17.78 | C22.2 106.68,17.78 | 106.68,17.78 105.41,17.78 105.41,16.51 102.87,16.51 105.41,19.05 C22.2 | C22.2 99.06,19.05 100.33,17.78 | 100.33,17.78 101.6,16.51 102.87,17.78 100.33,17.78
N$36
  Bottom 0.813: C27.2 119.38,11.43 VCA1.MP
N$37
  Bottom 0.813: GND2.MP 80.01,21.59 R22.1 | C20.2 77.47,7.62 | 77.47,6.35 78.74,5.08 82.55,5.08 | 82.55,5.08 87.63,5.08 C21.2 90.17,5.08 R25.2 R26.2 104.14,5.08 105.41,6.35 C23.2 | 107.95,6.35 C23.2 | C23.2 C26.2 V_GND.MP | 82.55,17.78 82.55,5.08
  Bottom 1.422: 72.39,12.7 73.66,12.7 C20.2 | 72.39,7.62 72.39,3.81 77.47,3.81 77.47,5.08 | 72.39,39.37 71.12,39.37 71.12,8.89 | 72.39,39.37 82.55,39.37 | 82.55,39.37 127,39.37 127,12.7 | 127,12.7 127,11.43 | 127,11.43 127,2.54 120.65,2.54 | 120.65,2.54 78.74,2.54 | 78.74,2.54 71.12,2.54 71.12,8.89 | 78.74,3.81 78.74,5.08 105.41,5.08 | 120.65,5.08 120.65,3.81 | 120.65,3.81 120.65,2.54 | 120.65,3.81 78.74,3.81 | 78.74,2.54 78.74,3.81 | 105.41,5.08 120.65,5.08 | 120.65,5.08 V_GND.MP | V_GND.MP 105.41,6.35 105.41,5.08 | 76.2,8.89 71.12,8.89 | 77.47,6.35 77.47,7.62 73.66,7.62 73.66,6.35 | 73.66,6.35 73.66,5.08 77.47,5.08 | 77.47,5.08 77.47,6.35 | 77.47,6.35 73.66,6.35 | C20.2 81.28,8.89 | 81.28,8.89 83.82,8.89 | 83.82,8.89 88.9,8.89 C21.2 78.74,6.35 78.74,7.62 87.63,7.62 | V_GND.MP 121.92,6.35 | 124.46,6.35 125.73,6.35 125.73,3.81 121.92,3.81 121.92,5.08 | 121.92,5.08 121.92,6.35 | 121.92,6.35 124.46,6.35 | 124.46,6.35 124.46,5.08 121.92,5.08 | 82.55,39.37 82.55,33.02 72.39,33.02 72.39,34.29 81.28,34.29 81.28,38.1 72.39,38.1 | 72.39,38.1 72.39,39.37 | 72.39,38.1 72.39,36.83 | 72.39,36.83 72.39,35.56 80.01,35.56 80.01,36.83 72.39,36.83 | C20.2 76.2,10.16 73.66,10.16 | 73.66,10.16 72.39,10.16 72.39,12.7 | 72.39,12.7 73.66,11.43 73.66,10.16 | V_GND.MP 121.92,7.62 | 124.46,10.16 127,12.7 | 125.73,7.62 121.92,7.62 | 121.92,7.62 124.46,10.16 | 124.46,10.16 125.73,10.16 125.73,8.89 124.46,8.89 127,11.43 | 81.28,8.89 80.01,10.16 80.01,16.51 R22.1 82.55,17.78 | 81.28,8.89 82.55,10.16 82.55,17.78 | 82.55,17.78 81.28,16.51 81.28,10.16 | 83.82,8.89 83.82,16.51 82.55,17.78
N$38
  Bottom 0.813: C22.1 118.11,19.05 C27.1 119.38,26.67 | 120.65,25.4 121.92,26.67 C25.2 119.38,30.48 114.96,30.48 C24.- 112.42,31.14 110.49,29.21 109.22,27.94 L3.1 104.14,27.94 102.87,27.94 101.6,26.67 99.06,24.13 T4.3
  Bottom 1.422: 100.33,24.13 100.33,25.4 | 100.33,25.4 119.38,25.4 119.38,26.67 | 119.38,26.67 120.65,26.67 | 120.65,26.67 120.65,27.94 | 120.65,27.94 C25.2 | 120.65,25.4 120.65,26.67 | 120.65,27.94 120.65,29.21 110.49,29.21 | 110.49,29.21 110.49,27.94 | 110.49,27.94 110.49,26.67 118.11,26.67 118.11,27.94 | 118.11,27.94 119.38,27.94 | 118.11,27.94 110.49,27.94 | 110.49,29.21 110.49,30.48 119.38,30.48 119.38,26.67 | 119.38,26.67 101.6,26.67 101.6,27.94 | 101.6,27.94 104.14,27.94 109.22,27.94 | 101.6,27.94 100.33,27.94 | 100.33,27.94 99.06,26.67 99.06,24.13 100.33,25.4 | 100.33,25.4 100.33,26.67 | ANT.MP 100.33,27.94
N$39
  Bottom 0.61: C32.1 R28.2 40.64,135.89 43.18,138.43 58.42,138.43 R27.2 72.78,142.24 L8.2 77.05,142.43 C33.+ 78.08,142.84 78.74,143.51 82.55,143.51 C31.1
N$40
  Bottom 0.61: ANT1.1 29.02,134.43 L4.1
N$41
  Bottom 0.61: L5.1 37.02,134.82 L4.2
N$42
  Bottom 0.61: L5.2 45.22,132.08 54.61,132.08 55.19,131.5 L6.1
N$43
  Bottom 0.61: L7.1 58.92,134.62 49.53,134.62 48.95,135.2 L6.2
N$44
  Bottom 0.61: R31.2 71.62,132.08 L8.1 68.58,133.74 68.58,132.08 68,131.5 L7.2 67.5,131 64.77,128.27 T5.3 | R31.2 C30.1 | R31.2 74.93,132.08 76.2,133.35 76.2,134.62 77.47,135.89 C33.- 78.14,138.43 82.55,138.43 C31.2
N$45
  Bottom 0.61: R28.1 43.18,118.11 R29.2 54.61,118.11 55.88,119.38 C28.1 60.96,121.92 60.96,123.19 62.23,124.46 T5.2
N$46
  Bottom 0.61: C30.2 R30.2 T5.1 64.77,119.38 63.5,118.11 C29.1
N$47
  Bottom 0.61: TO_MIXER.MP 82.55,134.62 81.28,133.35 R31.1
N$48
  Bottom 0.61: +V.MP R27.1
N$49
  Bottom 6.452: 69.85,113.03 88.9,113.03 88.9,127
N$50
  Bottom 3.81: 87.63,146.05 87.63,138.43 90.17,138.43 90.17,132.08 87.63,132.08 87.63,128.27 85.09,128.27 85.09,127
N$51  (via drill 2.2)
  Bottom 0.61: R30.1 68.58,110.49 | C28.2 50.8,124.46 C32.2 R29.1 43.18,125.73 40.64,123.19 38.1,123.19 35.56,120.65 35.56,118.11 35.56,110.49 | C29.2 59.69,114.3 59.69,111.76 59.69,110.49
  Bottom 1.676: 29.21,149.86 22.86,149.86 22.86,148.59 22.86,144.78 22.86,138.43 22.86,113.03 22.86,110.49 35.56,110.49 59.69,110.49 68.58,110.49 91.44,110.49 91.44,111.76 91.44,129.54 | 29.21,149.86 46.99,149.86 | 46.99,149.86 91.44,149.86 91.44,148.59 | 91.44,130.81 91.44,129.54 | v29.21,140.97 29.21,149.86 | GND3.MP 46.99,144.78 46.99,149.86 | v85.09,129.54 86.36,129.54 91.44,129.54
  Bottom 3.81: 83.82,127 83.82,129.54 86.36,129.54 | 88.9,128.27 91.44,128.27 | 91.44,128.27 91.44,130.81 91.44,148.59 | 22.86,144.78 46.99,144.78 | 22.86,138.43 26.67,138.43 26.67,143.51 | 24.13,118.11 35.56,118.11 38.1,118.11 38.1,115.57 | 59.69,111.76 73.66,111.76 73.66,118.11 85.09,118.11 | 85.09,118.11 85.09,116.84 | 85.09,118.11 85.09,125.73 80.01,125.73 80.01,119.38 82.55,119.38 82.55,123.19 | 91.44,128.27 91.44,111.76
  Bottom 6.452: 22.86,113.03 58.42,113.03 | 90.17,148.59 22.86,148.59 21.59,148.59 21.59,113.03